# EAGLE board fuel2-fixed2-jst3 (EAGLE 5.06)
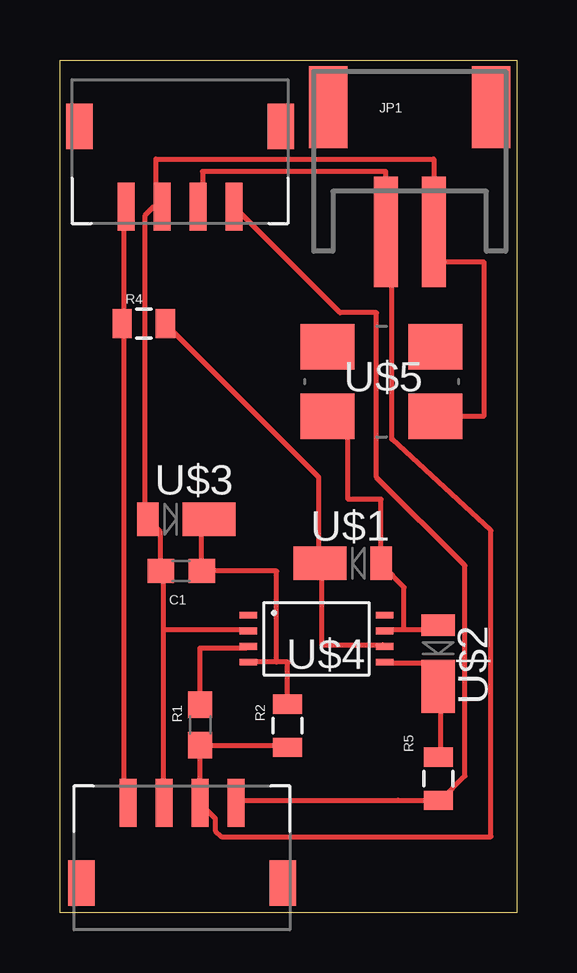
[diagram p0: board, top side]

Size 19.05 x 35.56 mm. Coordinates in mm from the lower left corner, seen from the top.
Outline: 0,35.56 19.05,35.56 19.05,0 0,0 0,35.56
Copper layers (1*16): Top 0.035mm / dielectric 1.5mm / Bottom 0.035mm
Design rules "SparkFun *": minimum track width 8mil, minimum drill 20mil, track to track 12mil, track to pad 12mil, pad to pad 8mil, via to via 10mil, smd to smd 8mil, copper to edge 10mil, drill to drill 8mil, minimum pad ring 12mil, minimum via ring 10mil, stop-mask expansion 4mil, vias tented up to drill 25mil, thermal gap 10mil

## Footprints (pad centres in the part's own frame; a part is rotated, then mirrored left to right if it is on the bottom)
0603 = smd 1.1 x 1: 1 -0.85,0; 2 0.85,0
S4B-ZR-SM4A-TF = smd 0.7 x 2: P$1 -2.25,-2.3; P$2 -0.75,-2.3; P$3 0.75,-2.3; P$4 2.25,-2.3 | smd 1.1 x 1.9: P$5 -4.2,1.05; P$6 4.2,1.05
S2B-PH = smd 1 x 4.6: 1 -1,-3.7; 2 1,-3.7 | smd 1.6 x 3.4: NC1 -3.4,1.5; NC2 3.4,1.5
0805 = smd 0.8 x 1.2: 1 -0.9,0; 2 0.9,0
POWERDI123 = smd 2.2 x 1.4: P$1 -0.95,0 | smd 0.9 x 1.4: P$2 1.6,0
TSOP-8 = smd 0.733 x 0.28: P$1 -2.841,0.975; P$2 -2.841,0.325; P$3 -2.841,-0.325; P$4 -2.841,-0.975; P$5 2.841,-0.975; P$6 2.841,-0.325; P$7 2.841,0.325; P$8 2.841,0.975
2412 = smd 2.25 x 1.9: P$1 -2.25,1.45; P$2 -2.25,-1.45; P$3 2.25,1.45; P$4 2.25,-1.45

## Placement (x,y rotation side)
C1  .1u  [0603]  5.06,14.25 0 top
J1  S4B-ZR-SM4A-TF  [S4B-ZR-SM4A-TF]  5.01,31.74 0 top
J2  S4B-ZR-SM4A-TF  [S4B-ZR-SM4A-TF]  5.09,2.29 180 top
JP1  [S2B-PH]  14.59,32.09 0 top
R1  1K  [0603]  5.84,7.84 270 top
R2  499  [0805]  9.48,7.8 270 top
R4  150  [0805]  3.5,24.56 0 top
R5  150  [0805]  15.78,5.6 90 top
U$1  DIODE-POWERDI123  [POWERDI123]  11.79,14.58 0 top
U$2  DIODE-POWERDI123  [POWERDI123]  15.78,10.39 90 top
U$3  DIODE-POWERDI123  [POWERDI123]  5.27,16.41 180 top
U$4  DS2782E+  [TSOP-8]  10.7,11.43 0 top
U$5  LVK24RXXXXXX  [2412]  13.42,22.15 0 top

## Library data of the parts
C1 JP1 R1 R2 R4 R5 = SparkFun
J1 J2 = con-jst-cubic
U$1-U$3 = diode-cubic
U$4 = maxim-cubic
U$5 = current-cubic

## Nets
GND: C1.1 J1.P$2 J2.P$3 JP1.2 U$3.P$2 U$4.P$2 U$5.P$4
I2C-SCL: J1.P$1 J2.P$4 R4.1
I2C-SDA: J1.P$4 J2.P$1 R5.1
N$1: R5.2 U$2.P$1 U$4.P$5
N$2: R4.2 U$1.P$1 U$4.P$6
N$4: C1.2 R2.1 U$3.P$1 U$4.P$4
N$5: R1.1 U$4.P$3
N$7: U$1.P$2 U$2.P$2 U$4.P$7 U$5.P$2
VCC: J1.P$3 J2.P$2 JP1.1 R1.2 R2.2

## Tracks (layer width: path | path; a pad name or v marks a point on that pad's centre or on a via)
GND
  Top 0.203: U$5.P$4 17.68,20.7 17.68,27.15 15.59,27.15 JP1.2 15.59,31.43 4,31.43 4,29.44 J1.P$2 3.94,29.46 3.56,29.08 3.56,16.51 U$3.P$2 3.68,16.38 4.19,15.88 4.19,14.35 C1.1 4.32,14.22 4.32,11.81 | 4.32,11.81 7.75,11.81 U$4.P$2 | 4.32,11.81 4.32,4.7 J2.P$3
I2C-SCL
  Top 0.203: J1.P$1 2.67,29.34 2.67,24.64 R4.1 2.67,24.51 2.67,4.83 2.79,4.7 J2.P$4
I2C-SDA
  Top 0.203: J2.P$1 7.37,4.7 14.1,4.7 R5.1 15.88,4.7 16.89,5.71 16.89,14.48 13.21,18.16 13.21,25.02 11.68,25.02 7.37,29.34 J1.P$4
N$1
  Top 0.203: U$4.P$5 13.59,10.41 15.75,10.41 15.75,9.53 U$2.P$1 15.88,9.4 15.88,6.6 R5.2
N$2
  Top 0.203: U$4.P$6 13.46,11.18 10.92,11.18 10.92,14.48 U$1.P$1 10.79,14.61 10.79,18.16 4.45,24.51 R4.2
N$4
  Top 0.203: 9.04,10.46 9.49,10.46 9.49,10.41 9.48,10.41 R2.1 | 9.04,10.46 U$4.P$4 | U$3.P$1 5.91,16.41 C1.2 9.04,14.25 9.04,10.46
N$5
  Top 0.203: U$4.P$3 7.75,11.05 5.84,11.05 5.84,8.76 R1.1
N$7
  Top 0.203: 14.35,11.81 15.75,11.81 15.75,11.94 U$2.P$2 | 14.35,11.81 13.59,11.81 U$4.P$7 | 14.35,11.81 14.35,13.59 13.46,14.48 U$1.P$2 13.39,17.25 12.02,17.25 12.02,20.7 U$5.P$2
VCC
  Top 0.203: J1.P$3 5.95,29.44 5.95,30.91 13.59,30.91 JP1.1 13.84,28.32 13.84,19.75 17.98,15.94 17.98,3.17 6.73,3.17 6.48,3.43 6.48,3.94 5.84,4.57 J2.P$2 5.84,4.7 R1.2 7.24,6.99 9.4,6.99 R2.2